# Altium PCB LiPoBattery.PcbDoc
Units mil, origin at the board's own origin, x right, y up, seen from the top; angles counter-clockwise.
Board outline 2000 x 2300 mil, 2 copper layers (Top Layer, Bottom Layer); 22 components, 10 nets, 59 pads, 12 vias.
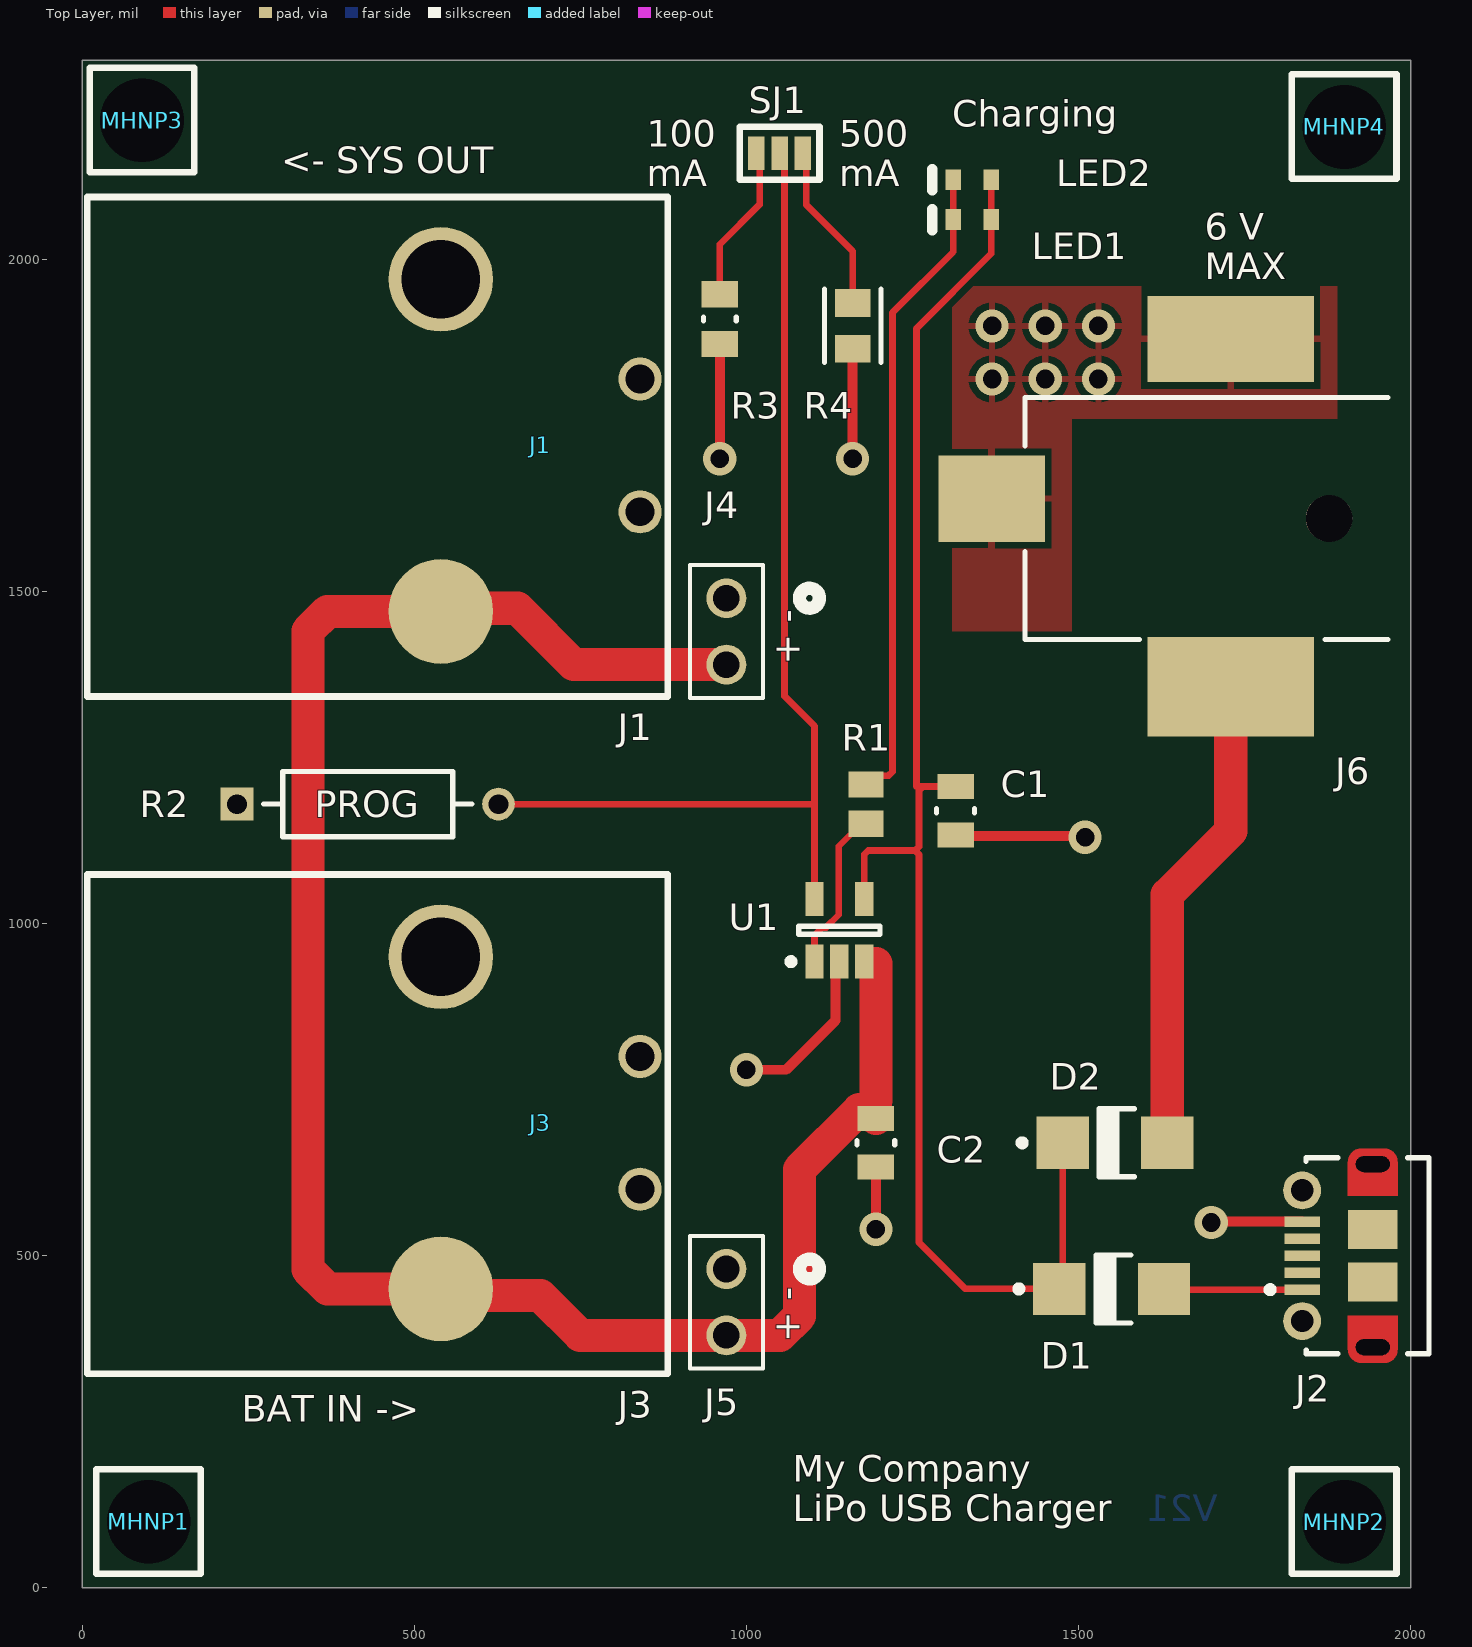
[diagram p0: Top Layer view]
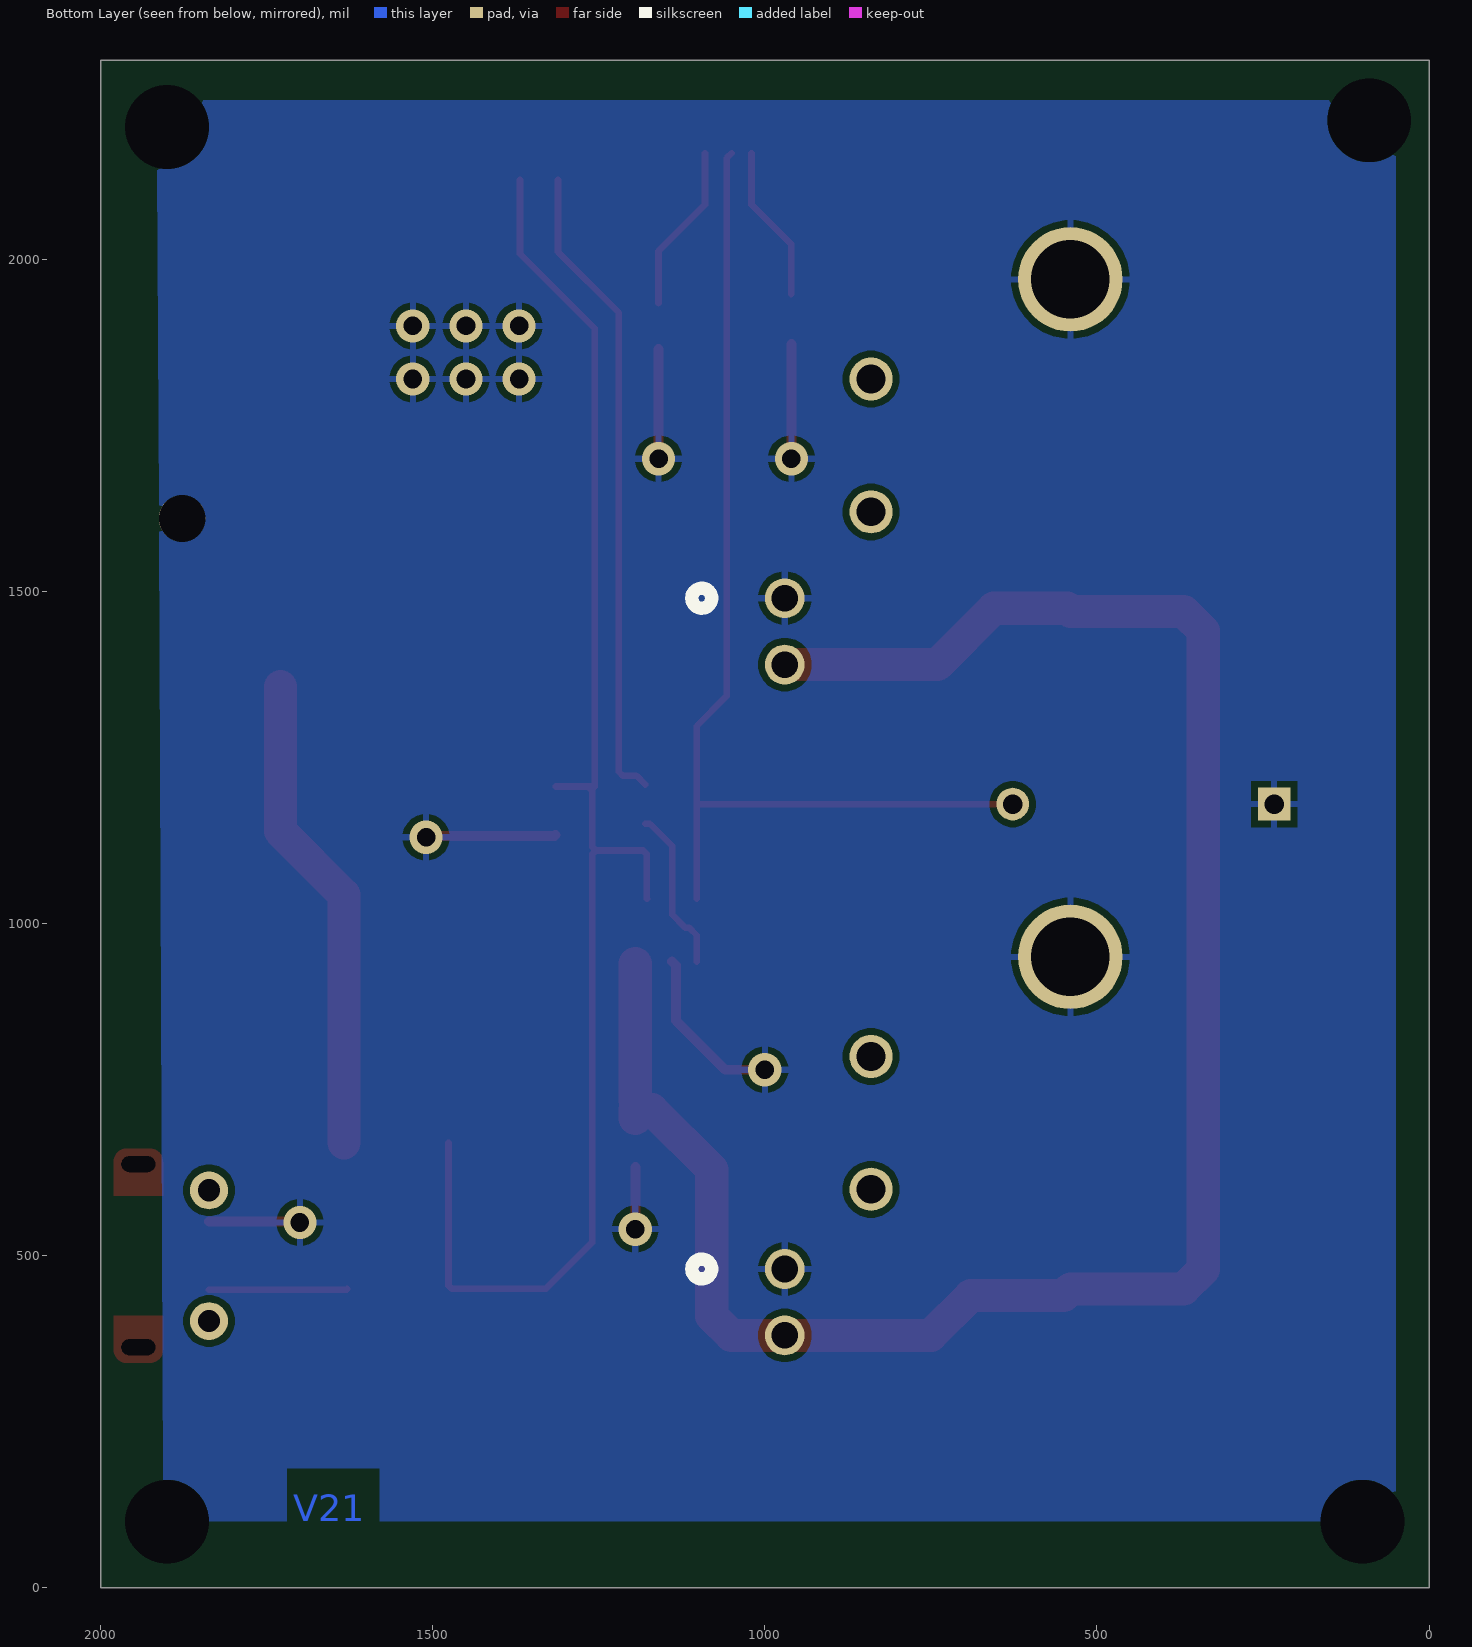
[diagram p1: Bottom Layer view, seen from below]
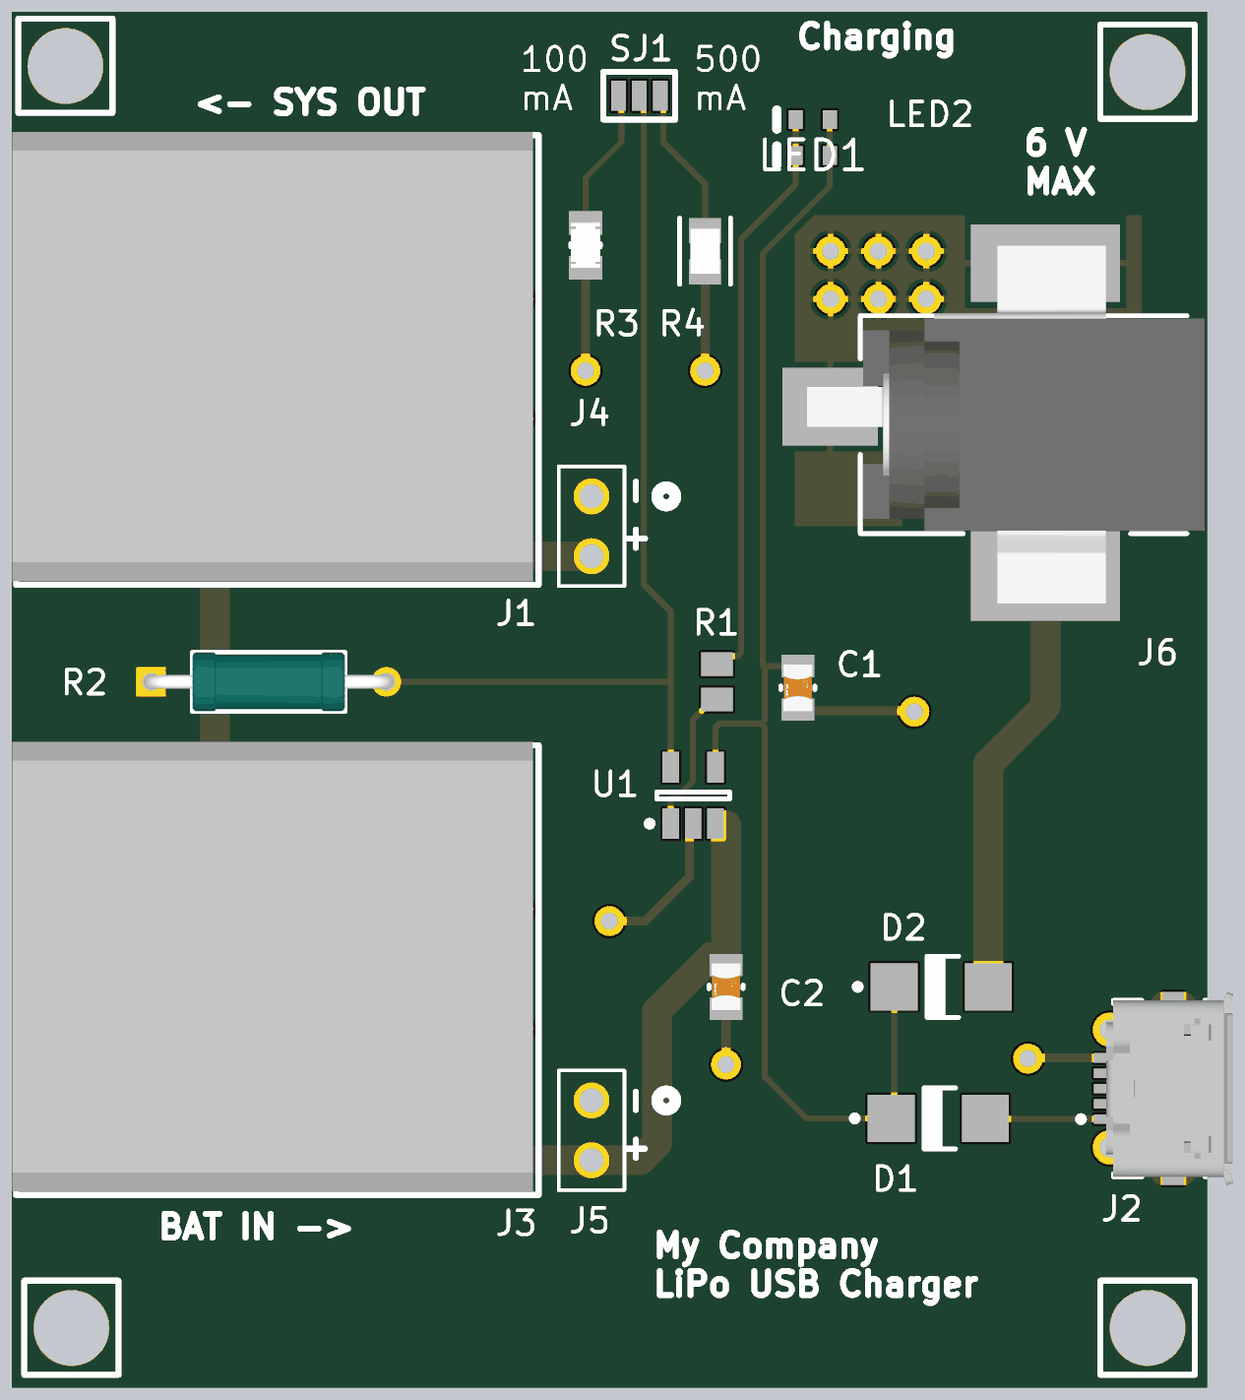
[diagram p2: 3D render of the assembled board from above, using the file's embedded part models]

## Layer stack, top to bottom
Top Solder: solder mask 0.4, Solder Resist, Dk 3.5
Top Layer: signal copper 1.4
Dielectric 1: dielectric 12.6, FR-4, Dk 4.8
Bottom Layer: signal copper 1.4
Bottom Solder: solder mask 0.4, Solder Resist, Dk 3.5

## Board outline
0,0 0,2300 2000,2300 2000,0

## Design rules (kind name [scope] priority, off if disabled: settings)
Clearance [All] p1: gap=10 ignorepadtopadclearanceinfootprint=TRUE except(0: Arc-Hole Track-Hole SMDPad-Hole THPad-Hole Via-Hole Fill-Hole Poly-Hole Region-Hole Text-Hole)
PolygonConnect [All] p1: connectstyle=Relief reliefconductorwidth=10 reliefentries=4 polygonreliefangle="90 Angle" airgapwidth=10
RoutingVias [All] p1: holewidth=28 width=50 viastyle="Through Hole" minholewidth=28 minwidth=50 maxholewidth=28 maxwidth=50
SolderMaskExpansion [All] p1: expansion=4 istentingtop=FALSE
SupplyNets "Schematic Supply Nets" [InNet('GND')] p1: voltage=0.000
Width [All] p1: maxlimit=60 minlimit=10 preferedwidth=10 minimp=50.000000 maximp=50.000000 favimp=50.000000
30 further rules are at their usual default settings.

## Components (designator, comment, footprint, x,y, rotation, side; value= is the part's Value field where it differs from the comment)
C1 "4.7uF" FP-CC0805-0_85-MFG 1315,1170 r270 top value="4.7 uF"
C2 "4.7uF" FP-CC0805-0_85-MFG 1195,670 r270 top value="4.7 uF"
D1 "40V, 1A" ONSC-SMA-2-403D-02_V 1550,450 r0 top
D2 "40V, 1A" ONSC-SMA-2-403D-02_V 1555,670 r0 top
J1 "CONN HEADER R/A 2POS 5.08MM" 1-179276-2 540,1970 r270 top locked
J2 "Micro-USB B Receptacle" USB-MICRO-B_V 1890,500 r90 top locked
J3 "CONN HEADER R/A 2POS 5.08MM" 1-179276-2 540,950 r270 top locked
J4 "2 POS VERT HEADER(0.001inch)" 2Pins_AMP 970,1490 r180 top
J5 "2 POS VERT HEADER(0.001inch)" 2Pins_AMP 970,480 r180 top
J6 "CONN PWR JACK 2.1X5.5MM SOLDER" FP-RASM722PTR13X-MFG 1710,1610 r90 top
LED1 "RED" VISH-TLMS1000_V 1340,2060 r180 top
LED2 "RED" VISH-TLMS1000_V 1340,2120 r180 top
MHNP1 "Mounting Hole Non-Plated 3.2mm" MTHNP3P2MM 100,100 r90 top
MHNP2 "Mounting Hole Non-Plated 3.2mm" MTHNP3P2MM 1900,100 r90 top
MHNP3 "Mounting Hole Non-Plated 3.2mm" MTHNP3P2MM 90,2210 r90 top locked
MHNP4 "Mounting Hole Non-Plated 3.2mm" MTHNP3P2MM 1900,2200 r90 top
R1 "330" RESC2013X60X40LL20T25 1180,1180 r270 top
R2 "PROG" FP-MRS25-MFG 430,1180 r0 top
R3 "2k" FP-CRCW0805-e3-IPC_B 960,1910 r90 top
R4 "10k" FP-CR0805-IPC_B 1160,1900 r90 top
SJ1 "SJUMPER3POS" SJUMPER3POS-Footprint-1 1050,2160 r0 top (schematic designator SJ?)
U1 "Charge Management Controller" SOT-23-OT5_M 1140,990 r90 top

## Footprints (in the part's own frame and the unit in brackets; to place one, negate y for a bottom-side part, rotate by r counter-clockwise, add the part's x,y. Pads: shape width x height; smd on the part's side, far side on the other; paste and mask are expansions set on the pad)
1-179276-2 [mm] "DYNAMIC_3200_HDR_ASSY_2P_HEADER_X19MM_Y22MM"
  round 4 hole 3: 1(0,0)
  round 4 smd: 2(12.7,0)
  round 1.65 hole 1.1: ""(3.81,7.62) ""(8.89,7.62)
  silkscreen extent -3.15,-13.53 15.95,8.67, body extent -3.29,-13.68 15.79,8.42, height 10.86
2Pins_AMP [mil]
  round 60 hole 40 paste-99999 mask+0: 1(0,0) 2(0,100)
  silkscreen extent -140,-50 55,150
FP-CC0805-0_85-MFG [mm]
  rect 0.95x1.4 smd paste+0 mask+0: 1(-0.925,0) 2(0.925,0)
  silkscreen extent -0.08,-0.72 0.08,0.72, body extent -1.6,-1.05 1.6,1.05, height 0.25
FP-CR0805-IPC_B [mil]
  rect 41.66x53.63 smd paste+0 mask+0: 1(-34.53,0) 2(34.53,0)
  silkscreen extent -55,-43 55,43, body extent -65,-37 65,37, height 10
FP-CRCW0805-e3-IPC_B [mil]
  rect 39.63x55.44 smd paste+0 mask+0: 1(-37.44,0) 2(37.44,0)
  silkscreen extent -3,-25 3,25, body extent -67,-38 67,38, height 10
FP-MRS25-MFG [mm]
  rect 1.25x1.25 hole 0.75 paste-2539.97 mask+0: 1(-5,0)
  round 1.25 hole 0.75 paste-2539.97 mask+0: 2(5,0)
  silkscreen extent -3.98,-1.25 3.98,1.25, body extent -5.72,-1.35 5.72,1.35, height 0.25
FP-RASM722PTR13X-MFG [mm]
  rect 3.3x4.06 smd paste+0 mask+0: 1(0.76,8.65)
  rect 3.81x6.35 smd paste+0 mask+0: 2(-6.43,-0.49)
  rect 3.3x6.35 smd paste+0 mask+0: 3(6.86,-0.49)
  round 1.78 hole 1.78 unplated paste-2539.97 mask+0: ""(0,-4.25)
  silkscreen extent -4.63,-6.5 4.63,7.38, body extent -8.43,-7.48 8.61,10.78, height 0.25
MTHNP3P2MM [mm] "Mounting Hole Non-Plated 3.2 mm hole"
  round 1 hole 3.2: ""(-0.012,-0.002)
  silkscreen extent -2,-2 2,2
ONSC-SMA-2-403D-02_V [mm] "Molded, 2-Leads, Body 4.57x2.92mm"
  rect 2x2 smd: 1(-2,0) 2(2,0)
  silkscreen extent -3.67,-1.3 0.74,1.3, body extent -2.16,-1.3 2.16,1.3, height 2.2
RESC2013X60X40LL20T25 [mm] "Chip Resistor, 2-Leads, Body 2.00x1.25mm, IPC High Density"
  rect 1x1.35 smd: 1(-0.75,0) 2(0.75,0)
  body extent -1.1,-0.72 1.1,0.72, height 0.6
SJUMPER3POS-Footprint-1 [mil]
  rect 25x50 smd: 1(-35,0) 2(0,0) 3(35,0)
  silkscreen extent -60,-40 60,40
SOT-23-OT5_M [mm] "SOT23, 5-Leads, Body 2.9x1.7mm, Pitch 0.95mm, Lead Span 2.8mm, IPC Low Density"
  rect 1.3x0.7 smd: 1(-1.2,0.95) 2(-1.2,0) 3(-1.2,-0.95) 4(1.2,-0.95) 5(1.2,0.95)
  silkscreen extent -1.32,-1.55 0.15,1.97, body extent -0.9,-1.55 0.9,1.55, height 1.45
USB-MICRO-B_V [mm] "USB, MICRO B, Body 7.491x4.695 mm, Pitch 0.65 mm"
  rect 0.4x1.35 smd: 1(-1.3,1.35) 2(-0.65,1.35) 3(0,1.35) 4(0.65,1.35) 5(1.3,1.35)
  round 1.45 hole 0.85: 6(-2.5,1.35) 7(2.5,1.35)
  rrect50% 0x0 hole 0.6 slot 1.3 at 90 deg: 8(-3.5,-1.35) 11(3.5,-1.35)
  rect 1.5x1.9 smd: 9(-1,-1.35) 10(1,-1.35)
  Top Layer circle w0.5: c3.6,-0.9 r0.25
  Top Layer circle w0.5: c3.6,-1.8 r0.25
  Top Layer circle w0.5: c-3.6,-0.9 r0.25
  Top Layer circle w0.5: c-3.6,-1.8 r0.25
  Top Layer region: -2.3,-2.3 -2.3,-0.4 -3.6,-0.4 -3.6,-2.3
  Top Layer region: 2.3,-0.4 2.3,-2.3 3.6,-2.3 3.6,-0.4
  Top Layer region: 3.6,-0.9 3.6,-1.8 4.1,-1.8 4.1,-0.9
  Top Layer region: -3.6,-1.8 -3.6,-0.9 -4.1,-0.9 -4.1,-1.8
  silkscreen extent -3.75,-3.5 3.75,2.7, body extent -4.1,-3.9 4.1,1.5, height 2.67
VISH-TLMS1000_V [mm] "SMD, 2-Leads, Body 0.8x1.6mm"
  rect 0.6x0.8 smd: 1(-0.725,0) 2(0.725,0)
  silkscreen extent 1.52,-0.4 1.52,0.4, body extent -0.8,-0.4 0.8,0.4, height 0.65

## Part data
C1 C2: library part CMP-03422-001352-1, "CAP CER 4.7UF 6.3V X5R 0805", Capacitance="4.7 uF", Manufacturer=Yageo, Manufacturer Part Number=CC0805KRX5R5BB475, Package=CC0805-0.85, Temperature="-30°C to +85°C", Temperature Characteristic=X5R, Temperature Range High=+85°C, Temperature Range Low=-30°C, Tolerance=0.1, Voltage Rating="6.3 V", Automotive=No, Category=Cap, ComponentLink2Description=Datasheet, ComponentLink2URL=http://www.yageo.com/documents/recent/UPY-GPHC_Y5V_6.3V-to-50V_8.pdf, Device Class L1="Passive Components", Device Class L2=Capacitors, Device Class L3="Ceramic Capacitors", Digikey Description="CAP CER 4.7UF 6.3V X5R 0805", Footprint Url=http://www.yageo.com/exep/pages/download/literatures/UPY-C_GEN_24.pdf, Height=0.95mm, Ipc Land Pattern Name=CAPC200125X85, Lead Free=Yes, Material=Ceramic, Mouser Description="Multilayer Ceramic Capacitors MLCC - SMD/SMT 4.7uF 6.3V X5R 10%", Octopart=https://octopart.com/cc0805krx5r5bb475-yageo-12885121, RoHS=TRUE
D1 D2: library part CMP-1055-00320-1, "Schottky Power Rectifier, 2-Pin SMA, Pb-Free, Tape and Reel", Manufacturer="On Semiconductor", PartNumber=MBRA140T3G, ComponentLink1Description="Manufacturer URL", ComponentLink1URL=http://www.onsemi.com/, ComponentLink2Description=Datasheet, ComponentLink2URL=http://www.onsemi.cn/pub_link/Collateral/MBRA140T3-D.PDF, ComponentLink3Description="Package Specification", ComponentLink3URL=http://www.onsemi.com/pub_link/Collateral/403D-02.PDF, Configuration=Single, DatasheetVersion="Rev. 10", IFSM Max (A)=30, Mounting Technology="Surface Mount", PackageDescription="2-Pin Small Molded Package, J-Bend Lead, Body 2.605 x 4.315 mm", PackageReference=SMA-2-403D-02, PackageVersion="Rev. G, 07/2012", Packing="Tape and Reel", RoHS=TRUE
J1: library part 1-179276-2, "Connector Header Through Hole, Right Angle 2 position 0.200\" (5.08mm)", Manufacturer="TE Connectivity-AMP Connectors", Supplier Part Number 1=A29545-ND, ComponentLink1Description="Product URL", ComponentLink1URL=https://www.te.com/en/product-1-179276-2.html?te_bu=Cor&te_type=srch&te_campaign=oct_usa_cor-oct-usa-srch-smbmktg-fy23-octopart-feed_sma-2210_1&elqCampaignId=147303, Manufacturer Part Number=1-179276-2, Supplier 1=Digikey
J2: library part CMP-2000-05827-1, "Micro-USB B Receptacle, Right Angle, Bottom Mount, Surface Mount, with Solder Tabs, -30 to 85 degC, 5-Pin USB, RoHS, Tape and Reel", Manufacturer=Molex, Package Description="5-Leads USB, Micro B, Body 7.5 x 5 mm, Pitch 0.65 mm", Package Reference=MICRO-B, Package Version="Rev. F, 12/2012", Standard Package=1, Voltage - Max=30V, 3D Model=105017-0001.stp, Catalog Drawings=1050170001, Category=Connectors,Interconnects, Circuits=5, Connector Type=USB-microB, Datasheet URL=http://www.molex.com/elqNow/elqRedir.htm?ref=http://www.molex.com/webdocs/datasheets/pdf/en-us/1050170001_IO_CONNECTORS.pdf, Datasheet Version=03/2016, Family=USB,DVI,HDMIConnectors, Featured Product=Micro-USBConnectorsUSBConnectors, Features=Shielded,SolderRetention, Gender=Receptacle, Ingress Protection=-, Manufacturer URL=http://www.molex.com/, Mating Products=WM17145-ND-CABLEMICROUSBBTOSTDA1.0MWM17147-ND-CABLEMICROUSBBTOSTDA2.0MWM17146-ND-CABLEMICROUSBBTOSTDA1.5M, Mounting Technology=SurfaceMount, Mounting Type=BoardCutout,SurfaceMount,RightAngle, Number of Contacts=5, Online Catalog=Molex-MicroUSB, Other Names=WM1399DKR, Package URL=http://www.molex.com/pdm_docs/sd/1050170001_sd.pdf, Packaging=Digi-Reel®, PCN Assembly/Origin=ResinSupplier21/Oct/2015, RoHS Information=1050170001CertofCompliance, Series=-, Specifications=-
J3: library part 1-179276-2, "Connector Header Through Hole, Right Angle 2 position 0.200\" (5.08mm)", Manufacter="TE Connectivity-AMP Connectors", Supplier Part Number 1=A29545-ND, ComponentLink1Description="Product URL", ComponentLink1URL=https://www.te.com/en/product-1-179276-2.html?te_bu=Cor&te_type=srch&te_campaign=oct_usa_cor-oct-usa-srch-smbmktg-fy23-octopart-feed_sma-2210_1&elqCampaignId=147303, Manufacturer Part Number=1-179276-2, Supplier 1=Digikey
J4: library part 67997-402HLF, "CONN HEADER VERT 2POS", Manufacturer="Amphenol ICC", Digi-Key_Part_Number_1=609-5502-ND, Digi-Key_Part_Number_2=67997-402HLF-ND, RefDes=RefDes, Supplier 1="Arrow Electronics", Supplier Part Number 1=67997-402HLF, Type=Type
J5: library part 67997-402HLF, "CONN HEADER VERT 2POS", Mfr_Name="Amphenol ICC", Digi-Key_Part_Number_1=609-5502-ND, Digi-Key_Part_Number_2=67997-402HLF-ND, RefDes=RefDes, Supplier 1="Arrow Electronics", Supplier Part Number 1=67997-402HLF, Type=Type
J6: library part CMP-47995-000002-1, Case/Package=SMD/SMT, Color=Black, Current Rating=5A, Manufacturer=Switchcraft, Package Quantity=120, Connector Type=Jack, Contact Material="Copper Alloy", Contact Plating=Tin, Gender=Male, Housing Color=Black, Housing Material=Thermoplastic, Manufaturer=Switchcraft, Mount="Surface Mount", Shielding=Unshielded, Termination=Solder
LED1 LED2: library part CMP-2000-07254-1, "Low Current LED, 40 mW, 1.8 V, -40 to 100 degC, 2-Pin SMD (0603), RoHS, Tape and Reel", Forward Current If=2mA, Forward Voltage=1.8V, LED Colour=Red, Manufacturer=Vishay, Package Description="2-Pin Surface Mount Device, Body 1.6 x 0.8 mm", Package Reference=TLMS1000, Automotive Qualification Standard=AEC-Q100, Bulb Size=1.6mmx0.8mm, Datasheet URL=https://datasheet.ciiva.com/5798/1698881-5798337.pdf, Datasheet Version="Rev. 1.7, 02/2011", LED Mounting=SMD, Lens Shape=Rectangular, Luminous Intensity=4mcd, Manufacturer URL=http://www.vishay.com/, Mounting Technology=SurfaceMount, MSL=MSL2-1year, Packaging=CutTape, Product Range=-, SVHC=ToBeAdvised, Viewing Angle=80°, Wavelength Typ=636nm
MHNP1: library part MTHNP3P2MM, "Mounting Hole Non-Plated 3.2mm drill hole", Manufacturer="Not Needed"
MHNP2 MHNP3 MHNP4: library part MTHNP3P2MM, "Mounting Hole Non-Plated 3.2mm drill hole"
R1: library part CMP-2001-00628-1, "Thin Film Chip Resistors, High Reliability / Type 6A 0805 / 0,1% / 330 Ohm / 0,1", Manufacturer=Panasonic, Part Number=ERA6AEB331V
R2: library part CMP-00030-42757237-1, "MRS25000C1000FRP00 Resistor, 100 Ohm, ± 1%, 600 mW, Axial Leaded, Metal Film (Thin Film), Professional", Case/Package=Axial, Manufacturer=Vishay, Max Operating Temperature=155°C, Max Power Dissipation=600mW, Min Operating Temperature=-55°C, Resistance=100Ω, Temperature Coefficient=50ppm/°C, Tolerance=1%, Voltage Rating=350V, Composition="Metal Film, Thin Film", Contact Plating=Tin, Diameter=2.5mm, Lead Diameter=600µm, Lead Free="Lead Free", Length=6.5mm, Military Standard=Not, Mount="Through Hole", NexarPartId=42757237, Number of Pins=2, Number of Terminations=2, Packaging="Tape & Reel (TR)", Power Rating=600mW, Radiation Hardening=No, REACH SVHC=Unknown, RoHS=Compliant, Schedule B="8533210090, 8533210090", Termination=Axial, Voltage Rating (DC)=350V, Width=2.5mm
R3: library part CMP-2001-03755-2, "RES Thick Film, 2kΩ, 1%, 0.125W, 100ppm/°C, 0805", Case Code (Imperial)=0805, Case Code (Metric)=2012, Manufacturer=Vishay, Max Operating Temperature=155°C, Max Power Dissipation=125mW, Min Operating Temperature=-55°C, Package Quantity=10, Resistance=2kR, Temperature Coefficient=100ppm/°C, Tolerance=1%, Voltage Rating=150V, Case/Package=0805, Composition="Thick Film", Contact Plating=Tin, Depth=1.25mm, Features="Automotive AEC-Q200", Height=0.02inch, Lead Free="Lead Free", Length=2mm, Military Standard=Not, Mount="Surface Mount", Number of Pins=2, Number of Terminals=2, Number of Terminations=2, Packaging="Tape and Reel", Power Rating=125mW, Radiation Hardening=No, Termination=SMD/SMT, Voltage Rating (DC)=150V, Weight=0.000194oz, Width=1.25mm, Working Voltage=150V
R4: library part CMP-07231-003873-1, "Thick Film Chip Resistors 0805 10kΩ 0.125W 5% 200ppm/°C", Case Code (Imperial)=0805, Case Code (Metric)=2012, Manufacturer=Bourns, Manufaturer=Bournes, Max Operating Temperature=155°C, Max Power Dissipation=125mW, Min Operating Temperature=-55°C, Package Quantity=1, Resistance=10kR, Temperature Coefficient=200ppm/°C, Tolerance=5%, Voltage Rating=150V, Voltage Rating (DC)=100V, Case/Package=0805, Composition="Thick Film", Contact Plating=Tin, Depth=1.25mm, Features="Moisture Resistant", Height=0.5mm, Length=2mm, Military Standard=Not, Mount="Surface Mount", Number of Pins=2, Number of Terminations=2, Packaging="Tape and Reel", Power Rating=125mW, Radiation Hardening=No, REACH SVHC="No SVHC", Termination=SMD/SMT, Thickness=508um, Width=1.25mm
SJ1: library part CMP-001-0000-1, "Solder jumper 3 pads and pins", Manufacturer="Not Needed", Pins=3
U1: library part CMP-0133-00139-1, "Simple, Miniature Single-Cell, Fully Integrated Li-Ion/Li-Polymer Charge Management Controller, 4.2V, 5-Pin SOT-23, Industrial Temperature, Tape and Reel", Manufacturer=Microchip, Code_IPC=SOT23-5, DatasheetVersion="revB, Sep-2007", PackageDescription="5-Lead Plastic Small Outline Transistor (OT) [SOT-23]", PackageReference=SOT-23-OT5, PackageVersion="revBB, Aug-2009"

## Via types
v1: diameter 50, hole 28, Top Layer to Bottom Layer, 12 vias

## Nets (pads, with @x,y where several pads share a name; then routed paths per layer and width w, separated by ;. In a path a pad name is that pad's centre, name@x,y a point inside that pad or via, vN(x,y) a via of type N, cw(c..) or ccw(c..) an arc to the next point about the centre after c; other vN are vias at no path point)
GND: C1.2 C2.2 J1.1 J2.5 J3.1 J4.1 J5.1 J6.1 J6.3 R2.1 R3.1 R4.1 U1.2 | length 1021.3
  Top Layer w15: v1(960,1700) R3.1 ; v1(1000,780) 1060,780 1133.88,853.88 1133.88,936.63 U1.2 ; v1(1160,1700) R4.1 ; v1(1195,540) C2.2 ; C1.2 1316.79,1131.79 1508.21,1131.79 v1(1510,1130) ; v1(1700,550) 1701.18,551.18 J2.5
  other v1: 1370,1820 1450,1820 1530,1820 1370,1900 1450,1900 1530,1900
NetC1_1: C1.1 D1.1 D2.1 LED1.1 LED2.1 U1.4 | length 2321.2
  Top Layer w10: U1.4 1177.56,1037.4 1177.56,1104.14 1183.42,1110 1254.14,1110 ; C1.1 1266.42,1206.42 ; LED2.1 LED1.1 1368.54,2008.54 1256.14,1896.14 1256.14,1206.42 1266.42,1206.42 ; D2.1 1476.26,455 D1.1 1330,450 1260,520 1260,1104.14 1254.14,1110 ; 1254.14,1110 1260,1115.86 1260,1200 1266.42,1206.42
NetC2_1: C2.1 J1.2 J3.2 J4.2 J5.2 U1.3 | length 3032.6
  Top Layer w40: J1.2 J1.2@544.69,1474.69
  Top Layer w50: J1.2 369.29,1470 340,1440.71 340,479.29 369.29,450 J3.2 550,440 690,440 750,380 J5.2 1050.71,380 1080,409.29 1080,630 1170,720 1181.67,720 1195,733.33 1195,940 ; J1.2@544.69,1474.69 655.31,1474.69 740,1390 J4.2 ; C2.1 C2.1@1195,720
NetD1_2: D1.2 J2.1 | length 208.6
  Top Layer w10: D1.2 1629.92,448.82 J2.1
NetD2_2: D2.2 J6.2 | length 726.4
  Top Layer w50: D2.2 1633.74,1043.74 1729.29,1139.29 J6.2
NetLED1_2: LED1.2 LED2.2 R1.1 | length 977.1
  Top Layer w10: R1.1 1193.33,1222.86 1214.14,1222.86 1220,1228.72 1220,1920 1311.46,2011.46 LED1.2 LED2.2
NetR1_2: R1.2 U1.1 | length 247.3
  Top Layer w10: U1.1 1102.6,982.6 1114.02,994.02 1119.96,994.02 1139.19,1013.25 1139.19,1116.55 1173.11,1150.47 R1.2
NetR2_2: R2.2 SJ1.2 U1.5 | length 1621.4
  Top Layer w10: R2.2 1100,1180 1102.6,1177.4 ; SJ1.2 1057.5,2152.5 1057.5,1342.5 1102.6,1297.4 1102.6,1177.4 ; U1.5 1102.6,1177.4
NetR3_2: R3.2 SJ1.1 | length 237.4
  Top Layer w10: R3.2 960,2022.5 1020,2082.5 SJ1.1@1020,2160
NetR4_2: R4.2 SJ1.3 | length 254.5
  Top Layer w10: SJ1.3@1090,2160 1090,2082.5 1160,2012.5 R4.2
pads on no net: J1. J2.2 J2.3 J2.4 J2.6 J2.7 J2.8 J2.9 J2.10 J2.11 J3. J6. MHNP1. MHNP2. MHNP3. MHNP4.

## Polygon pours and split planes (outlines as drawn)
GND on Bottom Layer "GND" (solid, pour order 0): 50,2240 1914.93,2240 1905.16,100 50,100
GND on Top Layer "GND" (solid, pour order 1): 1890,1760 1490,1760 1490,1440 1310,1440 1310,1960 1890,1960

## Other copper
Bottom Layer:
  text "V21" at 1710,100 h40

## Silkscreen, mask and mechanical layers (free items; w line width, h text height)
Top Overlay:
  text "Charging" at 1310,2200 h40
  text "<- SYS OUT" at 300,2130 h40
  text "100 / mA" at 850,2110 h40
  text "500 / mA" at 1140,2110 h40
  text "6 V / MAX" at 1690,1970 h40
  text "+ -" at 1080,1390 h40 r90
  text "PROG" at 350,1160 h40
  text "+ -" at 1080,370 h40 r90
  text "BAT IN ->" at 240,250 h40
  text "My Company        / LiPo USB Charger" at 1070,100 h40

## Text inside footprints (layer, text, board x,y; h text height)
J2: Mechanical 1 "PCB EDGE" at 2004.17,216.54 h11.81 r90